# Altium PCB PCB Layout.PCBDOC
Units mil, origin at the board's own origin, x right, y up, seen from the top; angles counter-clockwise.
Board outline 4710 x 2670 mil, 2 copper layers (Top Layer, Bottom Layer); 42 components, 82 nets, 250 pads, 49 vias.
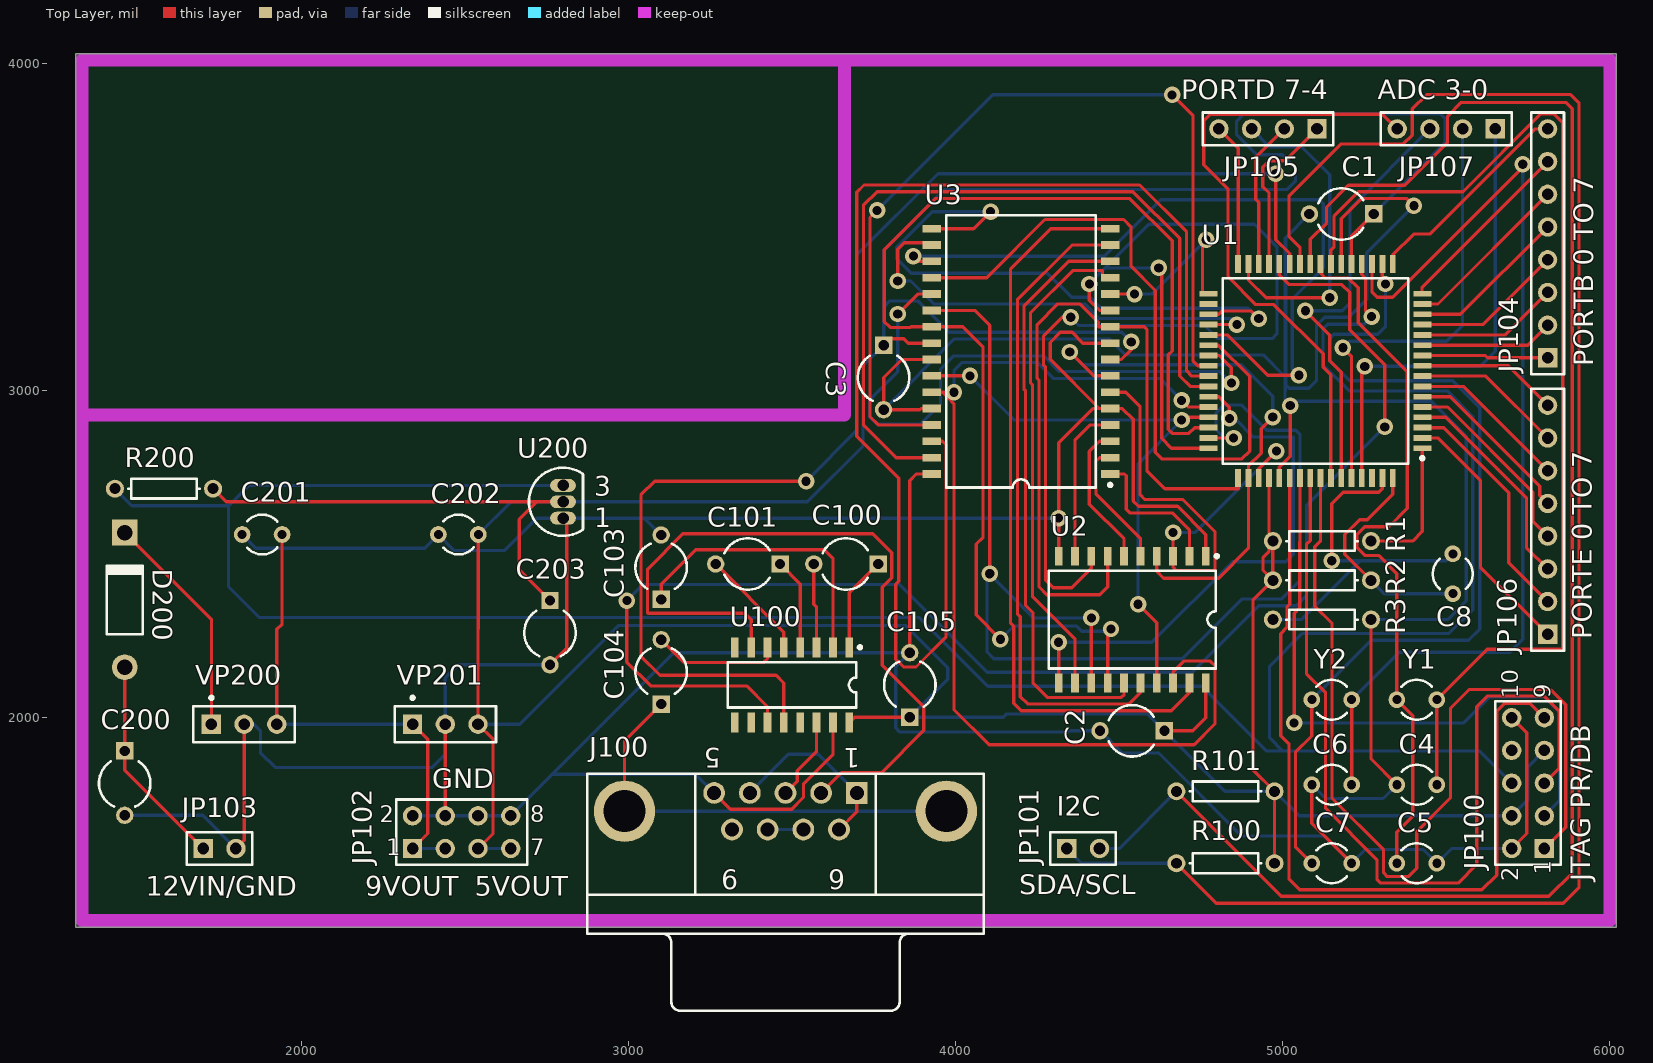
[diagram p0: Top Layer view]
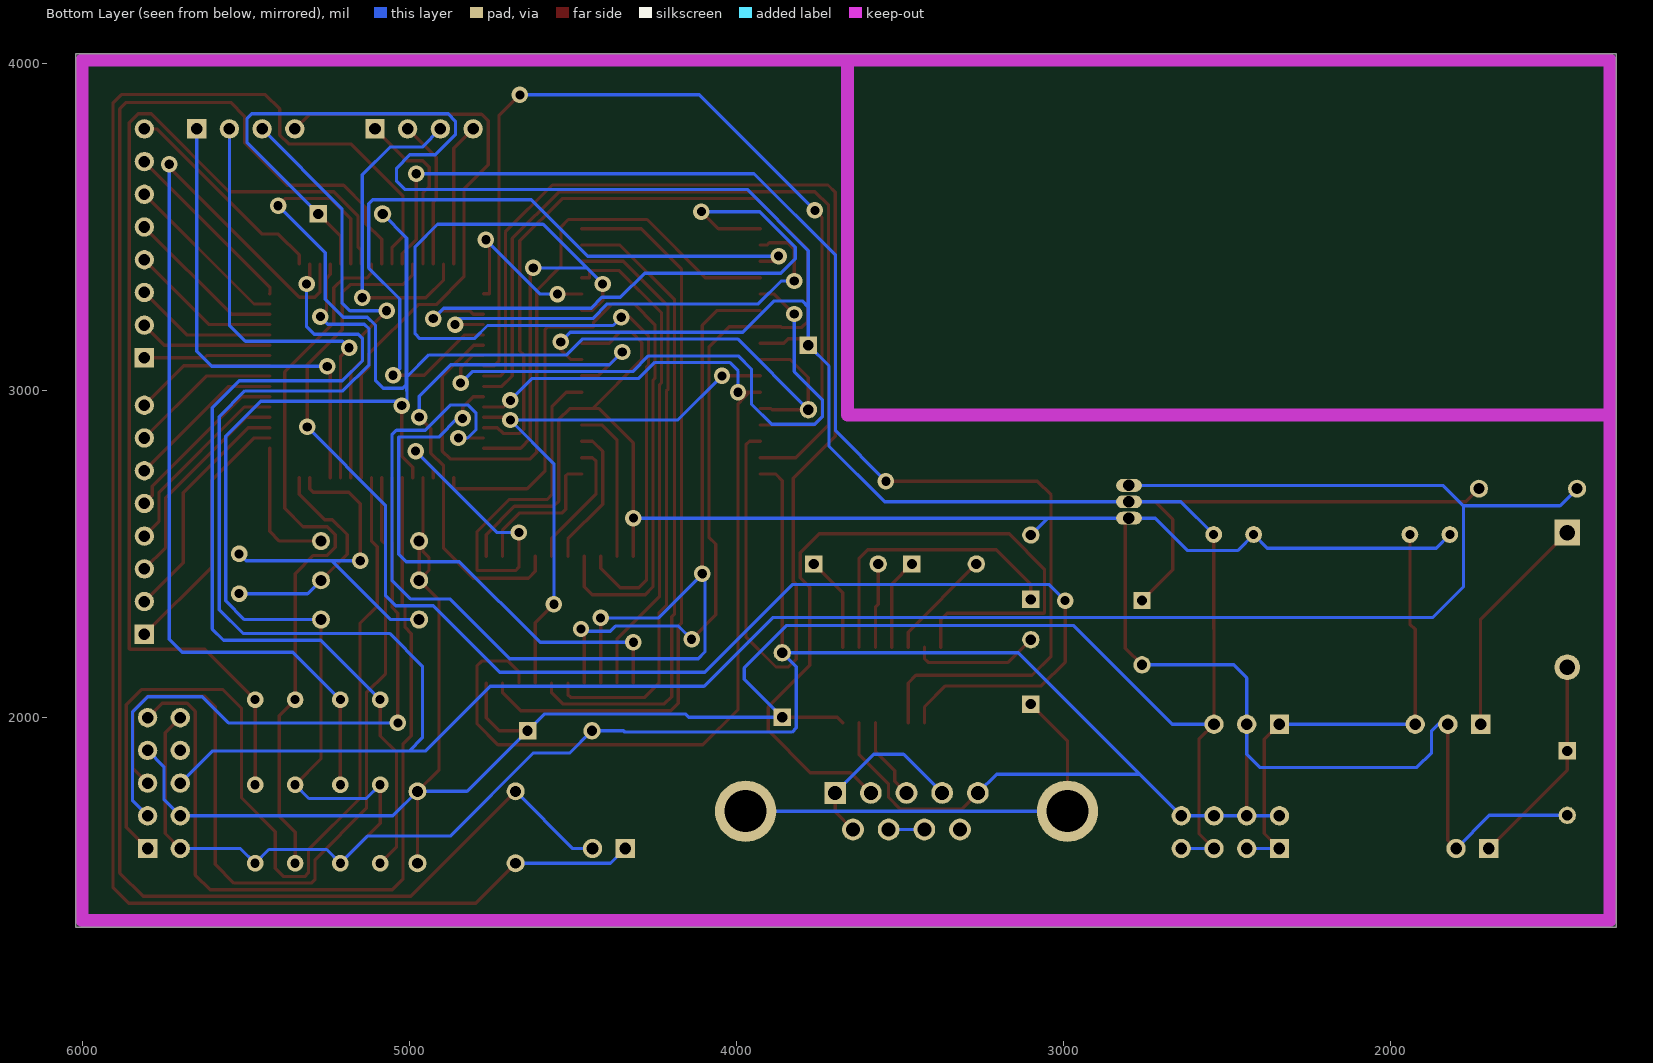
[diagram p1: Bottom Layer view, seen from below]

## Layer stack, top to bottom
Top Layer: signal copper 1.4
Dielectric: core 12.6, FR-4, Dk 4.8
Bottom Layer: signal copper 1.4

## Board outline
6020,4030 6020,1360 1310,1360 1310,4030

## Design rules (kind name [scope] priority, off if disabled: settings)
Clearance [All] p1: gap=10
ComponentClearance [All] p1: gap=10 collisioncheckmode=0
PolygonConnect [All] p1: connectstyle=Relief reliefconductorwidth=10 reliefentries=4 polygonreliefangle="90 Angle"
RoomDefinition "Interfaces and Connectors" [InComponentClass('Interfaces and Connectors')] p1 off: confinementstyle=ConfineIn formatcopy=TRUE outline 80,55 930,55 930,340 80,340
RoomDefinition "Power Regulation and Protection" [InComponentClass('Power Regulation and Protection')] p2 off: confinementstyle=ConfineIn formatcopy=TRUE outline 2050,75 3020,75 3020,270 2050,270
RoomDefinition "Microcontroller and Memory" [InComponentClass('Microcontroller and Memory')] p3 off: confinementstyle=ConfineIn formatcopy=TRUE outline 1015,60 2000,60 2000,245 1015,245
RoutingVias [All] p1: holewidth=28 width=50 viastyle="Through Hole" minholewidth=28 minwidth=50 maxholewidth=28 maxwidth=50
SolderMaskExpansion [All] p1: expansion=4
TestPointUsage [All] p1: valid=0 allowmultiple=FALSE
Testpoint [All] p1: side=15 testpointundercomponent=TRUE minsize=40 maxsize=100 preferedsize=60 minholesize=0 maxholesize=40 preferedholesize=32 testpointgrid=1 style=1023 order=-539222988
Width [All] p1: maxlimit=10 minlimit=10 preferedwidth=10
17 further rules are at their usual default settings.

## Classes and differential pairs
component class "Interfaces and Connectors": C100 C101 C103 C104 C105 J100 JP100 JP101 JP102 JP103 JP104 JP105 JP106 JP107 R100 R101 U100
component class "Microcontroller and Memory": C1 C2 C3 C4 C5 C6 C7 C8 R1 R2 R3 U1 U2 U3 Y1 Y2
component class "Power Regulation and Protection": C200 C201 C202 C203 D200 R200 U200 VP200 VP201
net class A[8..15]: A0 A1 A2 A3 A4 A5 A6 A7 A8 A9 A10 A11 A12 A13 A14 A15
net class AD[0..7]: AD0 AD1 AD2 AD3 AD4 AD5 AD6 AD7

## Components (designator, comment, footprint, x,y, rotation, side; value= is the part's Value field where it differs from the comment)
C1 "Cap Tant" CAPR5-4X5 5180,3540 r180 top
C2 "Cap Tant" CAPR5-4X5 4540,1960 r180 top
C3 "Cap Tant" CAPR5-4X5 3780,3040 r270 top
C4 "22pF" BCY-W2/D3.1 5410,1795 r90 top
C5 "22pF" BCY-W2/D3.1 5410,1555 r270 top
C6 "22pF" BCY-W2/D3.1 5150,1795 r90 top
C7 "22pF" BCY-W2/D3.1 5150,1555 r270 top
C8 "100nF" BCY-W2/D3.1 5520,2440 r0 top
C100 "Cap Elec" CAPR5-4X5 3665,2470 r180 top
C101 "Cap Elec" CAPR5-4X5 3365,2470 r180 top
C103 "Cap Elec" CAPR5-4X5 3100,2460 r90 top
C104 "Cap Elec" CAPR5-4X5 3100,2140 r90 top
C105 "Cap Elec" CAPR5-4X5 3860,2100 r90 top
C200 "Cap Elec" CAPR5-4X5 1460,1800 r270 top
C201 "100nF" BCY-W2/D3.1 1880,2560 r90 top
C202 "100nF" BCY-W2/D3.1 2480,2560 r90 top
C203 "Cap Elec" CAPR5-4X5 2760,2260 r270 top
D200 "1N4004" DIO10.46-5.3x2.8 1460,2360 r90 top
J100 "RS-232" DSUB1.385-2H9 3480,1340 r180 top
JP100 "JTAG" HDR2X5 5800,1600 r90 top
JP101 "I2C" HDR1X2 4340,1600 r0 top
JP102 "Voltage Outputs" HDR2X4 2340,1600 r0 top
JP103 "Voltage Input" HDR1X2 1700,1600 r0 top
JP104 "PORTB" HDR1X8 5810,3100 r90 top
JP105 "PORTD" HDR1X4 5105,3800 r180 top
JP106 "PORTE" HDR1X8 5810,2255 r90 top
JP107 "ADC Inputs" HDR1X4 5650,3800 r180 top
R1 "1K" AXIAL-0.3 5120,2540 r180 top
R2 "0K" AXIAL-0.3 5120,2420 r180 top
R3 "0K" AXIAL-0.3 5120,2300 r180 top
R100 "10K" AXIAL-0.3 4825,1555 r0 top
R101 "10K" AXIAL-0.3 4825,1775 r0 top
R200 "10K" AXIAL-0.3 1580,2700 r0 top
U1 "ATmega128" QFP14x14-G64/Y1.4N 5100,3060 r180 top
U2 "74373" SO-G20/Y1.45 4540,2300 r180 top
U3 "K6R1008C1D" SO-G32/Y1.45 4200,3120 r90 top
U100 "MAX232" SO-G16/C5.85 3500,2100 r180 top
U200 "ZM33064" BCY-W3 2800,2660 r0 top
VP200 "7809" PIN3 1725,1980 r0 top
VP201 "7805" PIN3 2340,1980 r0 top
Y1 "16MHz" BCY-W2/D3.1 5410,2055 r270 top
Y2 "32kHz" BCY-W2/D3.1 5150,2055 r270 top

## Footprints (in the part's own frame and the unit in brackets; to place one, negate y for a bottom-side part, rotate by r counter-clockwise, add the part's x,y. Pads: shape width x height; smd on the part's side, far side on the other; paste and mask are expansions set on the pad)
AXIAL-0.3 [mm]
  round 1.4 hole 0.85: 1(-3.81,0) 2(3.81,0)
  silkscreen extent -2.77,-0.76 2.77,0.76
BCY-W2/D3.1 [mm]
  round 1.3 hole 0.7: 1(0,1.55) 2(0,-1.55)
  silkscreen extent -1.55,-1.19 1.55,1.17
BCY-W3 [mm]
  oval 2x1 hole 0.9: 1(0,-1.27) 2(0,0) 3(0,1.27)
  silkscreen extent -2.65,-2.65 1.55,2.65
CAPR5-4X5 [mm]
  rect 1.35x1.35 hole 0.8: 1(-2.5,0)
  round 1.35 hole 0.8: 2(2.5,0)
  silkscreen extent -1.69,-2 1.82,2
DIO10.46-5.3x2.8 [mm]
  round 2 hole 1.2: 1(-5.23,0)
  rect 2x2 hole 1.2: 2(5.23,0)
  silkscreen extent -2.65,-1.4 2.75,1.41
DSUB1.385-2H9 [mm] "Connector; D Subminiature; 9 Position; Right Angle; Pitch 1.385 mm"
  rect 1.69x1.69 hole 1.09: 1(-5.54,-10.92)
  round 1.69 hole 1.09: 2(-2.77,-10.92) 3(0,-10.92) 4(2.77,-10.92) 5(5.54,-10.92) 6(-4.155,-8.08) 7(-1.385,-8.08) 8(1.385,-8.08) 9(4.155,-8.08)
  round 4.76 hole 3.26: 10(-12.495,-9.5) 11(12.495,-9.5)
  silkscreen extent -15.4,-12.4 15.4,6
HDR1X2 [mm]
  rect 1.5x1.5 hole 0.9: 1(0,0)
  round 1.5 hole 0.9: 2(2.54,0)
  silkscreen extent -1.27,-1.27 3.81,1.27
HDR1X4 [mm]
  rect 1.5x1.5 hole 0.9: 1(0,0)
  round 1.5 hole 0.9: 2(2.54,0) 3(5.08,0) 4(7.62,0)
  silkscreen extent -1.27,-1.27 8.89,1.27
HDR1X8 [mm]
  rect 1.5x1.5 hole 0.9: 1(0,0)
  round 1.5 hole 0.9: 2(2.54,0) 3(5.08,0) 4(7.62,0) 5(10.16,0) 6(12.7,0) 7(15.24,0) 8(17.78,0)
  silkscreen extent -1.27,-1.27 19.05,1.27
HDR2X4 [mm]
  rect 1.5x1.5 hole 0.9: 1(0,0)
  round 1.5 hole 0.9: 2(0,2.54) 3(2.54,0) 4(2.54,2.54) 5(5.08,0) 6(5.08,2.54) 7(7.62,0) 8(7.62,2.54)
  silkscreen extent -1.27,-1.27 8.89,3.81
HDR2X5 [mm]
  rect 1.5x1.5 hole 0.9: 1(0,0)
  round 1.5 hole 0.9: 2(0,2.54) 3(2.54,0) 4(2.54,2.54) 5(5.08,0) 6(5.08,2.54) 7(7.62,0) 8(7.62,2.54) 9(10.16,0) 10(10.16,2.54)
  silkscreen extent -1.27,-1.27 11.43,3.81
PIN3 [mm]
  rect 1.5x1.5 hole 0.9: 1(0,0)
  oval 1.51x1.5 hole 0.9: 2(2.54,0)
  round 1.5 hole 0.9: 3(5.08,0)
  silkscreen extent -1.4,-1.4 6.48,2.17
QFP14x14-G64/Y1.4N [mm]
  rect 1.4x0.45 smd: 1(-8.3,6) 2(-8.3,5.2) 3(-8.3,4.4) 4(-8.3,3.6) 5(-8.3,2.8) 6(-8.3,2) 7(-8.3,1.2) 8(-8.3,0.4) 9(-8.3,-0.4) 10(-8.3,-1.2) 11(-8.3,-2) 12(-8.3,-2.8) 13(-8.3,-3.6) 14(-8.3,-4.4) 15(-8.3,-5.2) 16(-8.3,-6) 33(8.3,-6) 34(8.3,-5.2) 35(8.3,-4.4) 36(8.3,-3.6) 37(8.3,-2.8) 38(8.3,-2) 39(8.3,-1.2) 40(8.3,-0.4) 41(8.3,0.4) 42(8.3,1.2) 43(8.3,2) 44(8.3,2.8) 45(8.3,3.6) 46(8.3,4.4) 47(8.3,5.2) 48(8.3,6)
  rect 0.45x1.4 smd: 17(-6,-8.3) 18(-5.2,-8.3) 19(-4.4,-8.3) 20(-3.6,-8.3) 21(-2.8,-8.3) 22(-2,-8.3) 23(-1.2,-8.3) 24(-0.4,-8.3) 25(0.4,-8.3) 26(1.2,-8.3) 27(2,-8.3) 28(2.8,-8.3) 29(3.6,-8.3) 30(4.4,-8.3) 31(5.2,-8.3) 32(6,-8.3) 49(6,8.3) 50(5.2,8.3) 51(4.4,8.3) 52(3.6,8.3) 53(2.8,8.3) 54(2,8.3) 55(1.2,8.3) 56(0.4,8.3) 57(-0.4,8.3) 58(-1.2,8.3) 59(-2,8.3) 60(-2.8,8.3) 61(-3.6,8.3) 62(-4.4,8.3) 63(-5.2,8.3) 64(-6,8.3)
  silkscreen extent -8.43,-7.2 7.2,7.2
SO-G16/C5.85 [mm]
  rect 0.6x1.55 smd: 1(-4.445,-2.925) 2(-3.175,-2.925) 3(-1.905,-2.925) 4(-0.635,-2.925) 5(0.635,-2.925) 6(1.905,-2.925) 7(3.175,-2.925) 8(4.445,-2.925) 9(4.445,2.925) 10(3.175,2.925) 11(1.905,2.925) 12(0.635,2.925) 13(-0.635,2.925) 14(-1.905,2.925) 15(-3.175,2.925) 16(-4.445,2.925)
  silkscreen extent -5.4,-3.05 5,1.75
SO-G20/Y1.45 [mm]
  rect 0.6x1.45 smd: 1(-5.715,-4.925) 2(-4.445,-4.925) 3(-3.175,-4.925) 4(-1.905,-4.925) 5(-0.635,-4.925) 6(0.635,-4.925) 7(1.905,-4.925) 8(3.175,-4.925) 9(4.445,-4.925) 10(5.715,-4.925) 11(5.715,4.925) 12(4.445,4.925) 13(3.175,4.925) 14(1.905,4.925) 15(0.635,4.925) 16(-0.635,4.925) 17(-1.905,4.925) 18(-3.175,4.925) 19(-4.445,4.925) 20(-5.715,4.925)
  silkscreen extent -6.69,-5.05 6.47,3.8
SO-G32/Y1.45 [mm]
  rect 0.6x1.45 smd: 1(-9.525,-6.925) 2(-8.255,-6.925) 3(-6.985,-6.925) 4(-5.715,-6.925) 5(-4.445,-6.925) 6(-3.175,-6.925) 7(-1.905,-6.925) 8(-0.635,-6.925) 9(0.635,-6.925) 10(1.905,-6.925) 11(3.175,-6.925) 12(4.445,-6.925) 13(5.715,-6.925) 14(6.985,-6.925) 15(8.255,-6.925) 16(9.525,-6.925) 17(9.525,6.925) 18(8.255,6.925) 19(6.985,6.925) 20(5.715,6.925) 21(4.445,6.925) 22(3.175,6.925) 23(1.905,6.925) 24(0.635,6.925) 25(-0.635,6.925) 26(-1.905,6.925) 27(-3.175,6.925) 28(-4.445,6.925) 29(-5.715,6.925) 30(-6.985,6.925) 31(-8.255,6.925) 32(-9.525,6.925)
  silkscreen extent -10.58,-7.05 10.58,5.8

## Part data
C1 C2 C3 C100 C101 C103 C104 C105 C200 C203: library part "Cap Pol2", "Polarized Capacitor (Axial)"
C4 C5 C6 C7 C8 C201 C202: library part Cap, "Capacitor"
D200: library part "D Zener", "Zener Diode"
J100: library part "D Connector 9", "Receptacle Assembly, 9 Position, Right Angle"
JP100: library part "Header 5X2", "Header, 5-Pin, Dual row"
JP101 JP103: library part "Header 2", "Header, 2-Pin"
JP102: library part "Header 4X2", "Header, 4-Pin, Dual row"
JP104 JP106: library part "Header 8", "Header, 8-Pin"
JP105 JP107: library part "Header 4", "Header, 4-Pin"
R1 R2 R3 R100 R101 R200: library part Res1, "Resistor"
U1: "Atmel ATmega128 MCU"
U2: "Octal 8-bit D-type Latch"
U3: library part K6R1016C1D, "Samsung 128kBit High-Speed Static RAM"
U100: "Maxim RS-232 Transceiver"
U200: "Generic 5V Supply Voltage Monitor"
VP200: library part 7805, "Generic 6V Voltage Regulator"
VP201: "Generic 6V Voltage Regulator"
Y1 Y2: library part XTAL, "Crystal Oscillator"

## Via types
v1: diameter 50, hole 28, Top Layer to Bottom Layer, 49 vias

## Nets (pads, with @x,y where several pads share a name; then routed paths per layer and width w, separated by ;. In a path a pad name is that pad's centre, name@x,y a point inside that pad or via, vN(x,y) a via of type N, cw(c..) or ccw(c..) an arc to the next point about the centre after c; other vN are vias at no path point)
5V: C1.1 C2.1 C3.1 C105.1 C202.2 C203.1 JP100.4 JP100.7 JP102.5 JP102.7 R1.2 R2.2 R100.2 R101.2 R200.2 U1.21 U1.52 U2.20 U3.8 U3.24 U100.16 U200.2 VP201.3 | length 14244.8
  Top Layer w10: R200.2 1770,2660 2720,2660 ; JP102.5 2586,1646 2586,1934 VP201.3 2540,2270 2541.02,2271.02 C202.2 ; C203.1 2666,2452.43 2666,2606 2720,2660 ; U200.2 2720,2660 ; U100.16 3691.73,2001.57 C105.1 ; C3.1 3800,3158.42 3841.58,3158.42 3855,3145 U3.24 ; U3.8 4507,3095 4537,3125 v1(4537,3149) ; C2.1 4725,1960 4765,2000 U2.20 ; U1.52 4958.27,2540 4958.27,2508.27 4940,2490 4940,2450 R2.2 ; R1.2 R2.2 ; R100.2 R101.2 4909,1841 4909,2359 R2.2 ; U1.21 5210.24,3471.81 C1.1
  Bottom Layer w10: JP102.5 JP102.7 ; VP201.3 2668,1980 2970,2282 3846,2282 3976,2152 3976,2117.57 C105.1 4145.57,2001.57 4155,2011 4587.43,2011 C2.1 4823.43,1775 R101.2 5050,1700 JP100.4 5750,1750 5750,1850 JP100.7 ; C202.2 2641.02,2660 U200.2 3547,2660 3717,2830 3717,3075.43 C3.1 3780,3255 ; v1(4537,3149) 4508,3178 3980,3178 3884,3274 3799,3274 3780,3255 ; C1.1 5496,3757.57 5496,3832 5482,3846 4881,3846 4859,3824 4859,3781.68 4920,3720.68 4998.32,3720.68 5039,3680 5039,3640 5014,3615 3967,3615 3780,3428 3780,3255
9V: C201.2 JP102.1 JP102.3 VP200.3 VP201.1 | length 1519.7
  Top Layer w10: VP200.3 1925,2270 1941.02,2286.02 C201.2 ; JP102.1 2386,1646 2386,1934 VP201.1
  Bottom Layer w10: VP200.3 VP201.1 ; JP102.1 JP102.3
"10-12V IN": C200.1 D200.1 JP103.1 | length 653.5
  Top Layer w10: D200.1 C200.1 1460,1840 JP103.1
A0: U2.2 U3.1 | length 453.4
  Top Layer w10: U3.1 4516.42,2745 4522,2739.42 4522,2636.85 4532.85,2626 4663,2626 4715,2574 U2.2
A1: U2.5 U3.2 | length 394.6
  Top Layer w10: U3.2 4440,2795 4429.09,2784.09 4429.09,2684.31 4565,2548.41 U2.5
A2: U2.6 U3.3 | length 440.5
  Top Layer w10: U3.3 4440,2845 4409,2814 4409,2652.46 4515,2546.46 U2.6
A3: U2.9 U3.4 | length 481.2
  Top Layer w10: U2.9 4365,2848 4412,2895 U3.4
A4: U2.12 U3.13 | length 1507
  Top Layer w10: U2.12 4365,2241 4235,2371 4235,3018 4229,3024 4229,3238 4358,3367 4448.61,3367 4449.1,3366.52 4449.1,3345 U3.13
A5: U2.15 U3.14 | length 1820.2
  Top Layer w10: U3.14 4346,3395 4209,3258 4209,3004 4214,2999 4214,2343 4237,2320 4237,2105 4280,2062 4507,2062 4515,2070 U2.15
A6: U2.16 U3.15 | length 1990.6
  Top Layer w10: U3.15 4356,3445 4189,3278 4189,2318.04 4198,2309.04 4198,2064.3 4220.3,2042 4530.86,2042 4565,2076.14 U2.16
A7: U2.19 U3.16 | length 2287.4
  Top Layer w10: U3.16 4291,3495 4168,3372 4168,2289 4178,2279 4178,2043.58 4200.58,2021 4660,2021 4715,2076 U2.19
A8: U1.35 U3.17 | length 1918.6
  Top Layer w10: U3.17 4055,3495 v1(4107,3547) ; U1.35 4804.23,3233.23 4814,3243 4904,3243 v1(4927,3220)
  Bottom Layer w10: v1(4107,3547) 3928.72,3547 3820,3438.28 3820,3403 3864,3359 4280.8,3359 4354.8,3285 4411,3285 4444,3252 4895,3252 v1(4927,3220)
A9: U1.36 U3.18 | length 1431.5
  Top Layer w10: v1(3823,3335) 3823,3432 3843,3452 3899,3452 3906,3445 U3.18 ; U1.36 v1(4860,3201.73)
  Bottom Layer w10: v1(3823,3335) 3863,3335 3933,3265 4394.59,3265 4439.59,3220 4860,3220 4861.73,3220 4870,3211.73 4880,3201.73 v1(4860,3201.73)
A10: U1.37 U3.19 | length 2290.9
  Top Layer w10: v1(3871,3411) 3887,3395 U3.19 ; U1.37 4830.76,3170.24 4954,3047 v1(5049.37,3047)
  Bottom Layer w10: v1(3871,3411) 4455,3411 4627,3583 5112,3583 5124,3571 5124,3374.63 5029.37,3280 5029.37,3067 v1(5049.37,3047)
A11: U1.38 U3.20 | length 2112.6
  Top Layer w10: U3.20 4095.05,3345 4273.05,3523 4513.5,3523 4536.5,3500 4536.5,3379.45 4610,3305.95 4610,2811 4630,2791 4875,2791 4899,2815 4899,3043.26 4803.52,3138.74 U1.38
A12: U1.39 U3.21 | length 1910.7
  Top Layer w10: v1(3823,3234) 3884,3295 U3.21 ; U1.39 4806,3107.24 4843,3070.24 v1(4843,3023)
  Bottom Layer w10: v1(3823,3234) 3823,3058 3737,2972 3737,2920 3760,2897 3892,2897 3954,2959 3954,3066 3994,3106 4269,3106 4317,3058 4808,3058 v1(4843,3023)
A13: U1.40 U3.29 | length 2781.1
  Top Layer w10: v1(3760,3551) 3738.42,3529.42 3738.42,2920 3763.42,2895 U3.29 ; v1(4662,3904) 4726,3840 4726,3090 4740.25,3075.75 U1.40
  Bottom Layer w10: v1(3760,3551) 4113,3904 v1(4662,3904)
A14: U1.41 U3.30 | length 3896.6
  Top Layer w10: U3.30 3960,2845 3971,2834 3971,2247 3879,2155 3841,2155 3817,2179 3817,2407.42 3826,2416.42 3826,2732.42 3698,2860.42 3698,3606.47 3720,3628.47 4562.53,3628.47 4706,3485 4706,3060.25 4722,3044.25 U1.41
A15: U1.42 U3.31 | length 2486.1
  Top Layer w10: U3.31 3819,2795 3718.42,2895.58 3718.42,3566.23 3760,3607.8 4542.2,3607.8 4685,3465 4685,3044.53 4716.78,3012.76 U1.42
AD0: U1.51 U2.3 U3.6 | length 1534
  Top Layer w10: U3.6 4520,2995 4564,2951 4564,2681.25 4578.25,2667 4694.72,2667 4793,2568.72 4793,2451 4792,2450 4675,2450 4665,2460 U2.3 v1(4665,2566) ; U1.51 4926.77,2761.2 v1(4980.57,2815)
  Bottom Layer w10: v1(4665,2566) 4731.57,2566 v1(4980.57,2815)
AD1: U1.50 U2.4 U3.7 | length 1699.4
  Top Layer w10: v1(4349,3118) 4422,3045 U3.7 ; U2.4 4615,2447.28 4635.62,2426.66 4804.38,2426.66 4895.28,2517.55 U1.50 4895.28,2770.04 4934.25,2809.02 4934.25,2883.5 v1(4969.5,2918.75)
  Bottom Layer w10: v1(4349,3118) 4388,3079 4873.24,3079 4969.5,2982.74 v1(4969.5,2918.75)
AD2: U1.49 U2.7 U3.10 | length 2295.9
  Top Layer w10: U2.7 4465,2400 4441,2376 4279,2376 4255,2400 4255,3032 4249,3038 4249,3201 4313,3265 4379,3265 4437,3207 4437,3195 U3.10 4577,3195 4585,3187 4585,2755 4640,2700 4863.78,2700 U1.49
AD3: U1.48 U2.8 U3.11 | length 3644.2
  Top Layer w10: v1(4352,3224) 4326,3224 4269,3167 4269,3077 4275,3071 4275,2420 4298,2397 4355,2397 4415,2457 U2.8 ; v1(4409,3326) 4409,3276 4440,3245 U3.11 ; v1(4621,3375) 4630,3366 4630,2853.78 4660,2823.78 U1.48
  Bottom Layer w10: v1(4352,3224) 4377,3199 4761,3199 4801,3159 4967.86,3159 4982.5,3173.64 4982.5,3439.5 4913.83,3508.17 4591.17,3508.17 4458,3375 ; v1(4409,3326) 4458,3375 ; v1(4621,3375) 4458,3375
AD4: U1.47 U2.13 U3.22 | length 4531.9
  Top Layer w10: U3.22 4059,3245 4104,3200 ; v1(4104,2440) 4104,2441 4104,3200 ; v1(4105,2441) 4105,3199 4104,3200 ; U2.13 v1(4415,2305) ; U1.47 4849.72,2855.28 v1(4850,2855)
  Bottom Layer w10: v1(4105,2441) v1(4104,2440) ; v1(4415,2305) 4238,2305 4104,2439 v1(4104,2440) ; v1(4850,2855) 4822,2855 4796,2881 4796,2931 4821,2956 4873.5,2956 4950.75,2878.75 5039.25,2878.75 5053,2865 5053,2419.56 4996.44,2363 4876,2363 4693,2180 4117,2180 4096,2201 4096,2432 v1(4104,2440)
AD5: U1.46 U2.14 U3.23 | length 3736.8
  Top Layer w10: v1(4137,2240) 4063,2314 4063,2531 4084,2552 4084,3133 4022,3195 U3.23 3864,3195 3862,3193 3800,3193 3782,3211 3782,3431 3938,3587 4532.62,3587 4662,3457.62 4662,3121 4650,3109 4650,2881 4662,2869 4713.23,2869 4731,2886.77 U1.46 ; U2.14 4465,2261 v1(4475,2271)
  Bottom Layer w10: v1(4137,2240) 4177,2280 4370,2280 4386,2264 4468,2264 v1(4475,2271)
AD6: U1.45 U2.17 U3.26 | length 1787.8
  Top Layer w10: U3.26 v1(4044,3045) ; v1(4558,2347) 4615,2290 U2.17 ; v1(4691,2910) 4699.27,2918.27 U1.45
  Bottom Layer w10: v1(4044,3045) 4179,2910 v1(4691,2910) 4558,2777 v1(4558,2347)
AD7: U1.44 U2.18 U3.27 | length 3191.2
  Top Layer w10: U3.27 3960,2995 ; v1(3995,2995) 3960,2995 ; U2.18 4665,2140 4698,2173 4779,2173 4793,2159 4793,1981 4729,1917 4103,1917 3995,2025 3995,2960 3977.5,2977.5 3960,2995 ; v1(4691,2970) 4711.24,2949.76 U1.44
  Bottom Layer w10: v1(3995,2995) 3995,3060 4021,3086 4249,3086 4298,3037 4624,3037 v1(4691,2970)
ADC0: JP107.1 U1.61 | length 1442.7
  Top Layer w10: U1.61 5241.73,3064.73 v1(5251,3074)
  Bottom Layer w10: v1(5251,3074) 5604,3074 5650,3120 JP107.1
ADC1: JP107.2 U1.60 | length 1403.2
  Top Layer w10: v1(5184,3131) 5210.24,3104.76 U1.60
  Bottom Layer w10: v1(5184,3131) 5204,3151 5501,3151 5550,3200 JP107.2
ADC2: JP107.3 U1.59 | length 1335.4
  Top Layer w10: v1(5069.37,3244) 5144,3169.37 5144,3091 5178.74,3056.26 U1.59
  Bottom Layer w10: v1(5069.37,3244) 5181.42,3244 5206,3268.58 5206,3556 JP107.3
ADC3: JP107.4 U1.58 | length 1902.9
  Top Layer w10: U1.58 5147.24,3047.76 5124,3071 5124,3112.21 4973.21,3263 4918,3263 4833,3348 4833,3616 4759,3690 4759,3825 4779,3845 5305,3845 JP107.4
AGND: C8.1 R3.2 U1.63 | length 1100.8
  Top Layer w10: v1(5150,2480) 5150,2654 5185,2689 5293.72,2689 5304.72,2700 U1.63
  Bottom Layer w10: R3.2 5056.48,2300 5236.48,2480 ; v1(5150,2480) 5236.48,2480 ; C8.1 5498.98,2480 5236.48,2480
ALE: U1.43 U2.11 | length 1640.8
  Top Layer w10: U2.11 v1(4315,2230.38) ; U1.43 4804.74,2981.26 4837,2949 v1(4837,2915)
  Bottom Layer w10: v1(4315,2230.38) 4600.38,2230.38 4847,2477 5010,2477 5032,2499 5032,2857.25 5031.25,2858 4910.25,2858 4853.25,2915 v1(4837,2915)
AVCC: C8.2 R2.1 U1.64 | length 687.9
  Top Layer w10: R2.1 5190,2500 5190,2560 5235,2605 5258.84,2605 5336.22,2682.38 U1.64
  Bottom Layer w10: R2.1 5311.02,2378.98 C8.2
GND: C1.2 C2.2 C3.2 C4.1 C5.1 C6.1 C7.1 C103.2 C105.2 C200.2 C201.1 C202.1 C203.2 J100.5 JP100.2 JP100.10 JP102.2 JP102.4 JP102.6 JP102.8 JP103.2 R3.1 U1.22 U1.53 U2.1 U2.10 U3.5 U3.9 U3.25 U3.28 U3.32 U100.15 U200.1 VP200.2 VP201.2 | length 20272.9
  Top Layer w10: JP103.2 1825,1625 VP200.2 ; JP102.4 VP201.2 ; C203.2 2811,2212.57 2811,2610 U200.1 ; J100.5 3311.81,1720 3499,1720 3535,1756 3535,1797 3625,1887 U100.15 ; C105.2 3860,2725 3880,2745 U3.32 ; U3.28 3894.57,2945 3891.15,2941.57 C3.2 3780,3040 3835,3095 U3.25 ; U2.10 v1(4315,2610) 4315,2840 4420,2945 4440,2945 ; U3.9 4389,3145 4356,3178 4320,3178 4289,3147 4289,3096 4440,2945 ; U2.1 4765,2559.62 4678.53,2646.09 4559.16,2646.09 4543,2662.25 4543,2912 4510,2945 U3.5 4440,2945 ; U1.53 4989.76,2765.76 5023,2799 v1(5023,2954) ; C6.1 5088.98,1677.05 C7.1 ; U1.22 5178.74,3525.74 5240,3587 5379,3587 v1(5401,3565) ; R3.1 5270,1873.98 C4.1 ; JP100.2 5746,1646 5746,1954 JP100.10
  Bottom Layer w10: C200.2 1698.43,1701.57 JP103.2 ; C201.1 1860.98,2518 2376.98,2518 C202.1 2467.98,2511 2620,2511 2719,2610 U200.1 3048.43,2610 ; VP200.2 1855,1980 1875,1960 1875,1893 1920,1848 2400,1848 2440,1888 VP201.2 2440,2121.57 2480,2161.57 C203.2 ; JP102.2 JP102.4 JP102.6 JP102.8 2767,1827 ; C103.2 3048.43,2610 ; J100.5 3204.81,1827 2767,1827 ; C3.2 3996.43,3158 4470,3158 4519,3109 4940,3109 5007,3042 5007,2999 ; v1(4315,2610) 3048.43,2610 ; C1.2 5009,3467.43 ; C6.1 5130.98,1753 5306.98,1753 C4.1 ; R3.1 5504,2300 5561,2357 5561,2860 5454,2967 5023,2967 v1(5023,2954) 5007,2970 5007,2999 ; v1(5401,3565) 5257,3421 5257,3279 5202,3224 5128,3224 5103,3199 5103,3030 5080,3007 5020,3007 5009,3018 5009,3467.43 ; JP100.2 5516.02,1600 C5.1 5429.02,1597 5253.02,1597 C7.1 5128.02,1638 4875,1638 4621,1892 4509.57,1892 C2.2 4345,1960 4341,1956 3830,1956 3817,1969 3817,2155.43 C105.2 3138.43,2198.43 2767,1827 ; 5007,2999 5008,2999 5008,3466.43 5009,3467.43
NetC100_1: C100.1 U100.1 | length 291.5
  Top Layer w10: U100.1 3675,2381.57 C100.1
NetC100_2: C100.2 U100.3 | length 258.3
  Top Layer w10: C100.2 3566.57,2346.43 3575,2338 U100.3
NetC101_1: C101.1 U100.4 | length 280.3
  Top Layer w10: C101.1 3525,2408.43 U100.4
NetC101_2: C101.2 U100.5 | length 341.2
  Top Layer w10: C101.2 3475,2261.57 U100.5
NetC103_1: C103.1 U100.2 | length 897.3
  Top Layer w10: C103.1 3100,2407.58 3205.42,2513 3599,2513 3625,2487 U100.2
NetC104_1: C104.1 J100.10 J100.11 | length 1357.8
  Top Layer w10: J100.11 2988.07,1929.64 C104.1
  Bottom Layer w10: J100.11 J100.10
NetC104_2: C104.2 U100.6 | length 393.5
  Top Layer w10: C104.2 3169.43,2169 3414,2169 3425,2180 U100.6
NetD200_2: D200.2 VP200.1 | length 695.7
  Top Layer w10: D200.2 1725,2300.91 VP200.1
NetJ100_1: J100.1 J100.4 J100.6 | length 559.4
  Top Layer w10: J100.6 3698.11,1712.64 J100.1
  Bottom Layer w10: J100.4 3489.02,1888 3580.03,1888 J100.1
NetJ100_2: J100.2 U100.7 | length 2360
  Top Layer w10: U100.7 3375,2300 3356,2319 3059.42,2319 3058.42,2320 3058.42,2454.42 3166,2562 3747,2562 3805,2504 3805,2428 3776,2399 3776,2160 3903,2033 3903,1961 3774,1832 3651.13,1832 J100.2
NetJ100_3: J100.3 U100.14 | length 254.3
  Top Layer w10: J100.3 3515.57,1805.5 3515.57,1838.19 3575,1897.62 U100.14
NetJ100_7: J100.7 J100.8 | length 109.1
  Bottom Layer w10: J100.8 J100.7
PB0: JP104.1 U1.10 | length 386.2
  Top Layer w10: U1.10 5619,3107.24 5626.24,3100 JP104.1
PB1: JP104.2 U1.11 | length 408.6
  Top Layer w10: U1.11 5748.74,3138.74 JP104.2
PB2: JP104.3 U1.12 | length 437
  Top Layer w10: U1.12 5680.24,3170.24 JP104.3
PB3: JP104.4 U1.13 | length 465.4
  Top Layer w10: U1.13 5611.73,3201.73 JP104.4
PB4: JP104.5 U1.14 | length 493.7
  Top Layer w10: U1.14 5543.23,3233.23 JP104.5
PB5: JP104.6 U1.15 | length 522.1
  Top Layer w10: U1.15 5474.72,3264.72 JP104.6
PB6: JP104.7 U1.16 | length 563.6
  Top Layer w10: U1.16 5426,3296.22 5426,3316 JP104.7
PB7: JP104.8 U1.17 | length 661.3
  Top Layer w10: U1.17 5336.22,3414.64 5400,3478.42 5449.95,3478.42 5771.53,3800 JP104.8
PD4: JP105.1 U1.29 | length 518.7
  Top Layer w10: U1.29 4958.27,3604 4939,3623.27 4939,3683 4959,3703 5008,3703 JP105.1
PD5: JP105.2 U1.30 | length 452.9
  Top Layer w10: U1.30 4926.77,3576.23 4918,3585 4918,3713 JP105.2
PD6: JP105.3 U1.31 | length 992.6
  Top Layer w10: U1.31 4895.28,3338 4949.28,3284 v1(5144,3284)
  Bottom Layer w10: JP105.3 4960.46,3744.54 5059,3744.54 5144,3659.54 v1(5144,3284)
PD7: JP105.4 U1.32 | length 437.6
  Top Layer w10: JP105.4 4863.78,3741.22 U1.32
PE0: JP106.1 U1.2 | length 787
  Top Layer w10: U1.2 5474.58,2855.28 5604.6,2725.25 5604.6,2460.4 JP106.1
PE1: JP106.2 U1.3 | length 728.9
  Top Layer w10: U1.3 5492.39,2886.77 5691,2688.16 5691,2474 JP106.2
PE2: JP106.3 U1.4 | length 664.2
  Top Layer w10: U1.4 5498.73,2918.27 5745,2672 5745,2520 JP106.3
PE3: JP106.4 U1.5 | length 598.7
  Top Layer w10: U1.5 5504,2949.76 5765.47,2688.29 5765.47,2599.53 JP106.4
PE4: JP106.5 U1.6 | length 535.2
  Top Layer w10: U1.6 5512.5,2981.26 5786,2707.76 5786,2679 JP106.5
PE5: JP106.6 U1.7 | length 490
  Top Layer w10: U1.7 5552.24,3012.76 JP106.6
PE6: JP106.7 U1.8 | length 461.6
  Top Layer w10: U1.8 5620.75,3044.25 JP106.7
PE7: JP106.8 U1.9 | length 433.2
  Top Layer w10: U1.9 5689.25,3075.75 JP106.8
PEN*: R1.1 U1.1 | length 423.1
  Top Layer w10: R1.1 5397,2540 5426.77,2569.77 U1.1
RESET: JP100.6 R200.1 U1.20 U200.3 | length 8366.2
  Top Layer w10: U1.20 5241.73,3355.27 5253,3344 5253,3245 v1(5272,3226)
  Bottom Layer w10: R200.1 1482,2648 1778,2648 ; U200.3 1840,2710 1778,2648 ; v1(5272,3226) 5249,3203 5137.78,3203 5123,3188.22 5123,3079 5203,2999 5502.58,2999 5581,2920.58 5581,2330 5508.44,2257.44 5060.44,2257.44 4960,2157 4960,1938 5000,1898 ; JP100.6 5602,1898 5000,1898 ; 1778,2648 1777,2647 1777,2401 1872,2306 3889,2306 4099,2096 4753,2096 4951,1898 5000,1898
RXD: U1.27 U100.12 | length 4041
  Top Layer w10: U100.12 3475,2106 3451.35,2129.65 3096.35,2129.65 3038,2188 3038,2681 3080,2723 v1(3543,2723) ; v1(4979,3663) 4979,3461.26 5021.26,3419 U1.27
  Bottom Layer w10: v1(3543,2723) 3697,2877 3697,3413.76 3946.24,3663 v1(4979,3663)
SCL: JP101.2 R101.1 U1.25 | length 5149.4
  Top Layer w10: R101.1 4996,1454 5814,1454 5885,1525 5885,3861 5865,3881 5546,3881 5504,3839 5504,3759 5373,3628 5201,3628 5134.19,3561.19 5134.19,3512.19 5084.25,3462.25 U1.25
  Bottom Layer w10: JP101.2 4500,1600 R101.1
SDA: JP101.1 R100.1 U1.26 | length 5347.9
  Top Layer w10: R100.1 4797,1433 5858,1433 5906,1481 5906,3879 5880,3905 5440,3905 5396,3861 5396,3781 5369,3754 5178.71,3754 5019,3594.29 5019,3472 5052.76,3438.24 U1.26
  Bottom Layer w10: JP101.1 4385,1555 R100.1
TCK: JP100.1 U1.57 | length 2812.5
  Top Layer w10: U1.57 5115.75,2540.61 5097.7,2522.56 5097.7,2341.3 5151,2288 5151,1753 5308.38,1595.62 5308.38,1526.02 5320,1514.41 5384.41,1514.41 5410,1540 5410,1652 5513,1755 5513,2029.48 5569.52,2086 5819,2086 5865,2040 5865,1665 JP100.1
TDI: JP100.9 U1.54 | length 2590.2
  Top Layer w10: U1.54 5021.26,2346.14 5013,2337.88 5013,2276 4994,2257 4994,1945 5019,1920 5019,1507 5052,1474 5609,1474 5654,1519 5654,2019 5679.53,2044.53 5755.47,2044.53 JP100.9
TDO: JP100.3 U1.55 | length 1956.8
  Top Layer w10: v1(5035,1984) 5035,2319.88 5052,2336.88 5052,2537 5052.76,2537.76 U1.55
  Bottom Layer w10: v1(5035,1984) 5553,1984 5633,2064 5800,2064 5846,2018 5846,1746 JP100.3
TMS: JP100.5 U1.56 | length 2660.1
  Top Layer w10: U1.56 5084.25,2541.41 5072.56,2529.72 5072.56,2134.88 5131,2076.44 5131,1723 5288,1566 5288,1506.41 5300,1494.41 5536.08,1494.41 5593,1551.33 5593,2034.01 5624.99,2066 5799,2066 5845,2020 5845,1845 JP100.5
TOSC1: C6.2 U1.19 Y2.1 | length 3038.8
  Top Layer w10: C6.2 Y2.1 ; U1.19 5273.23,3300.77 5289,3285 5336,3285 5734,3683 v1(5734,3692)
  Bottom Layer w10: Y2.1 5356.02,2200 5694,2200 5734,2240 v1(5734,3692)
TOSC2: C7.2 U1.18 Y2.2 | length 2788.2
  Top Layer w10: C7.2 5039,1604.98 5039,1894.02 5088.98,1944 Y2.2 ; U1.18 5304.72,3335.28 v1(5314,3326)
  Bottom Layer w10: Y2.2 5270.98,2237 5568,2237 5602,2271 5602,2948 5520,3030 5205,3030 5143,3092 5143,3159 5156,3172 5291.17,3172 5314,3194.83 v1(5314,3326)
TXD: U1.28 U100.11 | length 4368.9
  Top Layer w10: v1(2995,2358) 2995,2170 3068,2097 3361,2097 3425,2033 U100.11 ; U1.28 4989.76,3354.24 5020,3324 5181,3324 5205,3300 5205,3186 5312,3079 v1(5312,2889)
  Bottom Layer w10: v1(2995,2358) 3044,2407 3829,2407 4097,2139 4723.44,2139 4927,2342.56 5041.28,2342.56 5073,2374.28 5073,2650 v1(5312,2889)
WR*: U1.33 U3.12 | length 549.6
  Top Layer w10: U3.12 v1(4547,3295) ; v1(4766,3460.95) 4755,3449.95 4755,3296.22 U1.33
  Bottom Layer w10: v1(4547,3295) 4600.05,3295 v1(4766,3460.95)
XTAL1: C5.2 U1.24 Y1.2 | length 2206.9
  Top Layer w10: U1.24 5115.75,3358.25 5130,3344 5201,3344 5231,3314 5231,3206.9 5381,3056.9 5381,2640 5325,2584 5251,2584 5226,2559 5226,2521 5251,2496 5292.98,2496 5348.98,2440 Y1.2 5398,2005.98 5398,1699 5348.98,1649.98 C5.2
XTAL2: C4.2 U1.23 Y1.1 | length 3308.3
  Top Layer w10: U1.23 5147.24,3429.24 5157,3439 5157,3534 5231,3608 5551.24,3608 5789.24,3846 5829,3846 5856,3819 5856,2211 5854,2209 5625.02,2209 Y1.1 C4.2
pads on no net: J100.9 JP100.8 U1.34 U1.62 U100.8 U100.9 U100.10 U100.13

## Keep-outs
Keep-Out Layer:
  lines w40: 1330,2925 3660,2925 3660,4010 ; 1330,1380 1330,4010 6000,4010 6000,1380 1330,1380

## Silkscreen, mask and mechanical layers (free items; w line width, h text height)
Top Overlay:
  text "PORTD 7-4" at 4690,3890 h60
  text "ADC 3-0" at 5290,3890 h60
  text "PORTB 0 TO 7" at 5950,3075 h60 r90
  text "PORTE 0 TO 7" at 5945,2240 h60 r90
  text "GND" at 2400,1785 h60
  text "I2C" at 4310,1700 h60
  text "JTAG PR/DB" at 5940,1500 h60 r90
  text "SDA/SCL" at 4195,1460 h60
  text "12VIN/GND" at 1525,1455 h60
  text "9VOUT" at 2195,1455 h60
  text "5VOUT" at 2530,1455 h60

## Text inside footprints (layer, text, board x,y; h text height)
J100: Top Overlay "6" at 3663.27,1535.87 h59.06 r180; Top Overlay "9" at 3336.1,1535.87 h59.06 r180; Top Overlay "5" at 3281.57,1905.94 h59.06 r180; Top Overlay "1" at 3707.95,1905.94 h59.06 r180
JP100: Top Overlay "2" at 5720,1500 h50 r90; Top Overlay "1" at 5820,1520 h50 r90; Top Overlay "9" at 5820,2060 h50 r90; Top Overlay "10" at 5720,2060 h50 r90
JP102: Top Overlay "2" at 2240,1680 h50; Top Overlay "1" at 2260,1580 h50; Top Overlay "7" at 2700,1580 h50; Top Overlay "8" at 2700,1680 h50
U200: Top Overlay "1" at 2895.32,2582.09 h59.05; Top Overlay "3" at 2895.32,2678.39 h59.05